# Altium PCB ee453_pcb_N-B-S.PcbDoc (part 2 of 2)
Units mil, origin at the board's own origin, x right, y up, seen from the top; angles counter-clockwise.
Board outline 6000 x 5000 mil, 4 copper layers (Power Layer, Signal layer, Ground layer, Extra signal layer), stack 53.912 mil thick; 97 components, 66 nets, 398 pads, 70 vias.
Unrouted connection lines stored in the file: 8.
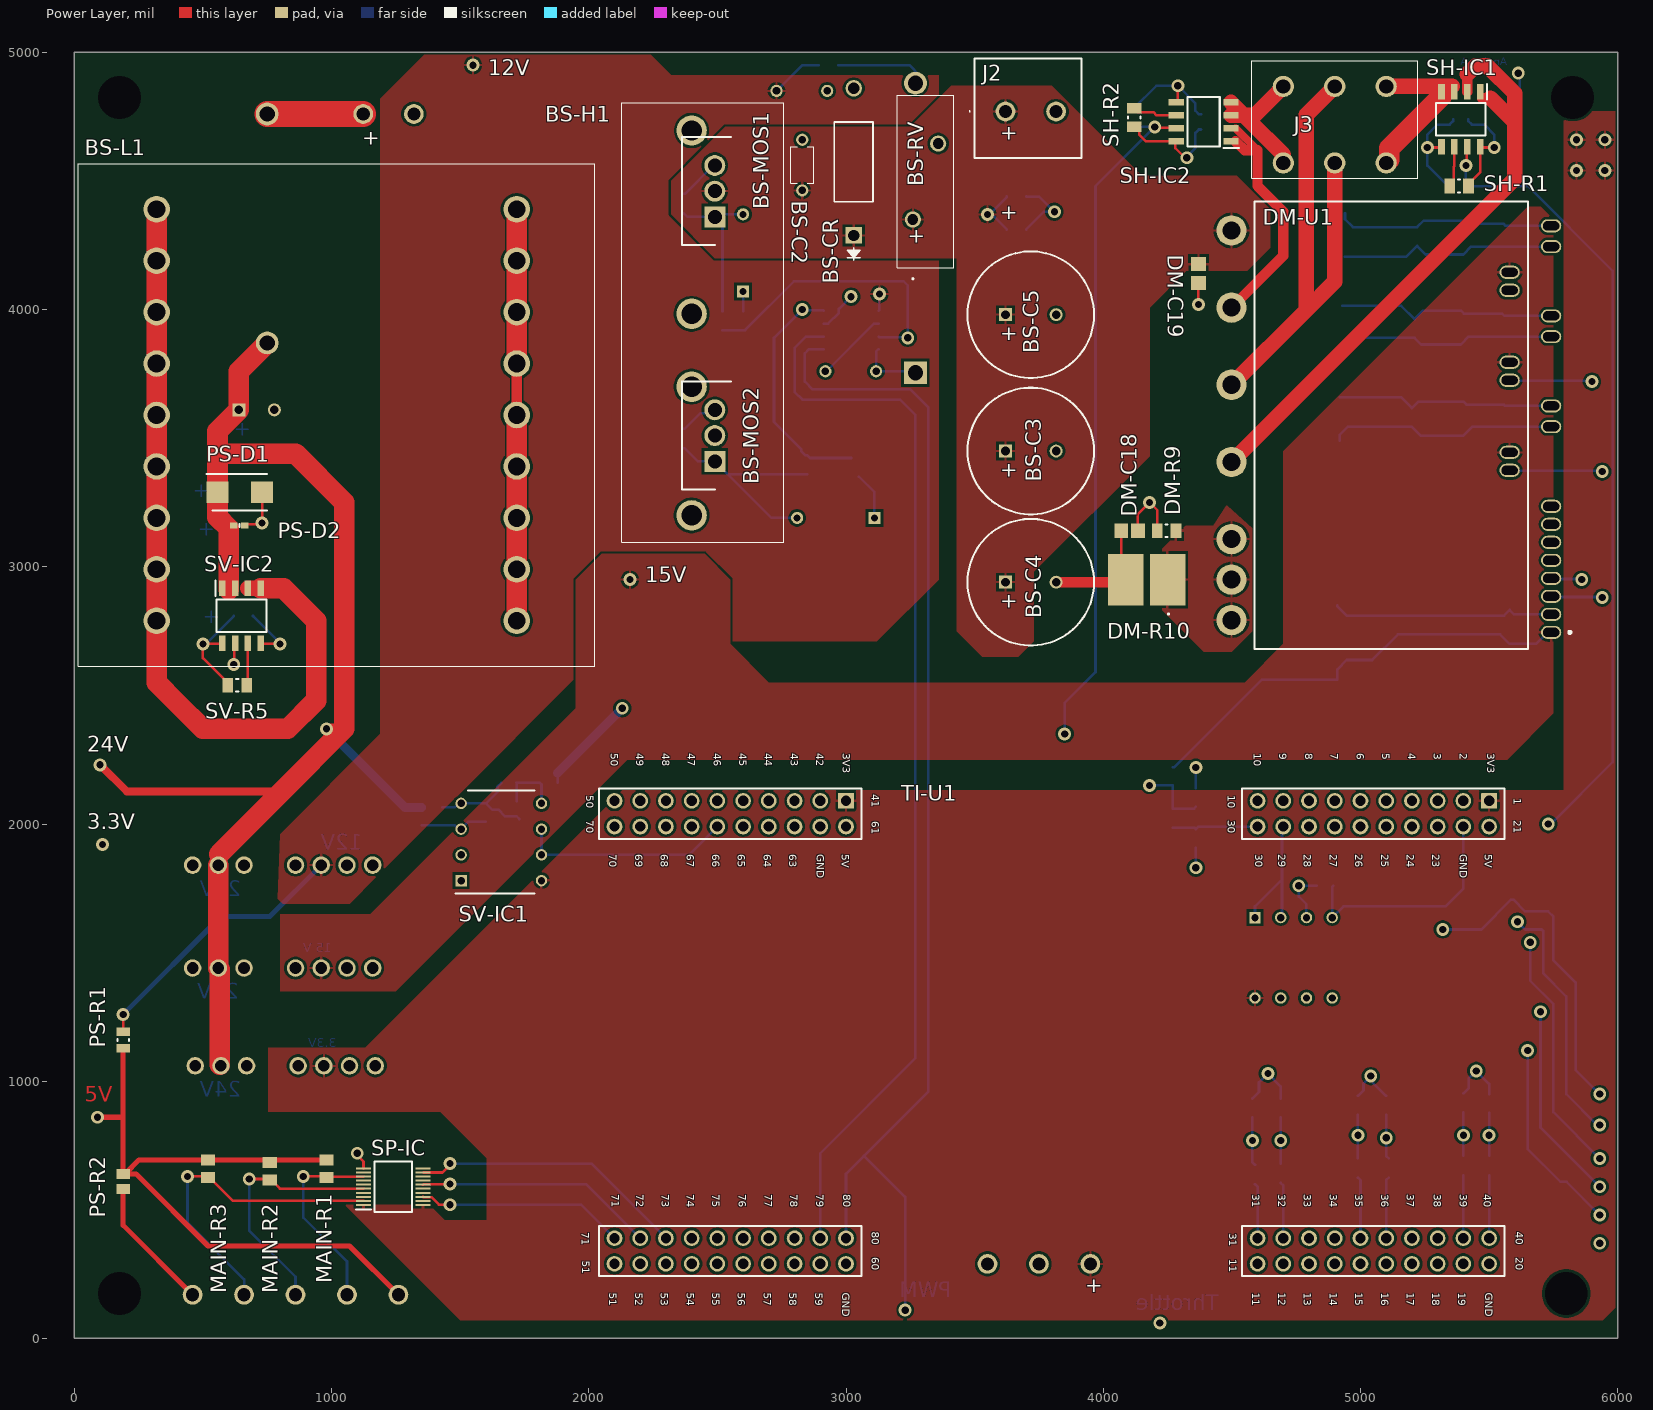
[diagram p0: Power Layer view]

## Via types
v1: diameter 50, hole 28, Power Layer to Extra signal layer, 69 vias
v2: diameter 50/50/50/50 (per signal layer), hole 28, Power Layer to Extra signal layer, 1 vias

## Nets (pads, with @x,y where several pads share a name; then routed paths per layer and width w, separated by ;. In a path a pad name is that pad's centre, name@x,y a point inside that pad or via, vN(x,y) a via of type N, cw(c..) or ccw(c..) an arc to the next point about the centre after c; other vN are vias at no path point) (continued)
GND: (continued)
  Extra signal layer w10: SV-C3.1 694.8,2808.03 800,2702.83 v1(800,2700) ; SV-R2.1 1478.82,2064.45 1494.37,2080 SV-IC1.4 SV-C1.1 ; SV-R4.1 1645.31,2145.31 1645.31,2124.33 1600.98,2080 SV-C1.1 ; SV-C2.2@1730.47,2019.53 SV-C2.2 1674.7,2030 1649.23,2055.47 1624.53,2055.47 SV-C1.1 ; BS-R8.1 2373.94,3536.77 2434.25,3597.09 2477.09,3597.09 BS-MOS2.3 ; BS-IC1.3 2930.45,3945 2972.59,3987.14 2972.59,4002.59 v1(3020,4050) ; BS-C8.1 3700,4311.97 3768.03,4380 v1(3810,4380) 3751.97,4438.03 3701.97,4438.03 BS-C7.1 ; SH-C4.1 4207.17,4870 v1(4290,4870) 4358.43,4801.57 4358.43,4772.76 4372.13,4759.06 SH-C2.2 ; v2(4360,1830) DM-C4.1 ; DM-C5.1 v1(4360,2220) ; DM-C3.1 4605.51,958.35 4605.51,995.51 v1(4640,1030) 4690,980 DM-C9.1 ; DM-C6.1 4890,1755.04 SH-IC3.4 4933.7,1680 5330,1680 5400,1750 TI-U1.22 ; DM-C11.2 4910,2846.34 4946.34,2810 DM-C10.1 5558.11,2810 DM-D4.1 5596.89,2815 DM-U1.2 ; DM-C2.1 5011.72,964.55 5011.72,991.72 v1(5040,1020) 5047.65,1012.35 5047.65,995.18 DM-C8.1 ; SH-C3.1 5260,4560 v1(5260,4630) 5260,4680 5298.43,4718.43 5346.3,4718.43 5360,4732.13 SH-C1.2 ; DM-C1.1 5421.72,974.55 5421.72,1011.72 v1(5450,1040) 5500,990 DM-C7.1
hallInA: J4.2 MAIN-R1.1 SP-IC.8 | length 768.2
  Power Layer w10: v1(890,630) 975.55,630 MAIN-R1.1 983.82,629.37 SP-IC.8
  Extra signal layer w10: v1(890,630) 890,470 1060,300 J4.2
hallInB: J4.3 MAIN-R2.1 SP-IC.5 | length 984.6
  Power Layer w10: v1(680,620) 755.55,620 MAIN-R2.1 765.91,615.55 799.33,582.13 SP-IC.5
  Extra signal layer w10: v1(680,620) 680,420 860,240 J4.3
hallInC: J4.4 MAIN-R3.1 SP-IC.2 | length 1274.9
  Power Layer w10: v1(440,630) 515.55,630 MAIN-R3.1 525.91,625.55 616.57,534.88 SP-IC.2
  Extra signal layer w10: v1(440,630) 440,450 660,230 J4.4
HO: BS-D2.2 BS-MOS1.1 BS-R3.2 BS-R7.1 | length 619.3
  Extra signal layer w10: BS-R7.1 2383.23,4360 BS-MOS1.1 ; BS-R3.2 2520,4330 BS-MOS1.1 ; BS-D2.2 2500.12,4370.12 BS-MOS1.1
Inductor: BS-Cboot.1 BS-IC1.6 BS-L1.10 BS-L1.11 BS-L1.12 BS-L1.13 BS-L1.14 BS-L1.15 BS-L1.16 BS-L1.17 BS-L1.18 BS-MOS1.3 BS-MOS2.2 BS-R7.2 | length 2049
  Power Layer w40: BS-L1.14 BS-L1.15
  Power Layer w80: BS-L1.10 BS-L1.11 BS-L1.12 BS-L1.13 BS-L1.14 ; BS-L1.15 BS-L1.16 BS-L1.17 BS-L1.18
  Extra signal layer w10: BS-R7.2 2373.94,4450 2483.94,4560 BS-MOS1.3 ; BS-Cboot.1 2924.55,3760 3109.55,3945 BS-IC1.6
LO: BS-D1.2 BS-MOS2.1 BS-R1.2 BS-R8.2 | length 861.8
  Extra signal layer w10: BS-R8.2 2373.94,3460 2423.94,3410 BS-MOS2.1 2540,3360 ; BS-D1.2 2710,3190 2540,3360 ; BS-R1.2 2540,3360
NetBS-D1_1: BS-D1.1 BS-R2.2 | length 185
  Extra signal layer w10: 3050,3350 3110.24,3289.76 BS-D1.1
NetBS-D2_1: BS-D2.1 BS-R4.2 | length 77
  Extra signal layer w10: BS-R4.2 BS-D2.1
NetBS-IC1_4: BS-IC1.4 BS-R1.1 BS-R2.1 | length 927.1
  Extra signal layer w10: v1(2830,4000) 2720,3890 2720,3562.83 2826.46,3456.38 2826.46,3448.5 2842.13,3432.83 BS-R1.1 2860,3422.83 BS-R2.1 ; v1@2832.5,3997.5 2910.73,3997.5 BS-IC1.4
NetBS-IC1_7: BS-IC1.7 BS-R3.1 BS-R4.1 | length 1124.7
  Extra signal layer w10: BS-R3.1 BS-R4.1 2607.87,3920 2797.87,4110 3224.14,4110 3240,4094.14 v1(3240,3890) 3237.5,3892.5 3129.27,3892.5 BS-IC1.7
NetDM-C12_1: DM-C12.1 DM-C13.2 DM-D3.1 DM-U1.19 | length 845
  Extra signal layer w10: DM-C13.2 5178.19,4205.35 DM-C12.1 5253.11,4214.06 DM-D3.1 5430.59,4244.65 DM-U1.19
NetDM-C14_1: DM-C14.1 DM-C15.2 DM-D2.1 DM-U1.15 | length 863.8
  Extra signal layer w10: DM-C15.2 4930,3863.5 4956.5,3890 DM-C14.1 5235.94,3864.06 DM-D2.1 5420.59,3894.65 DM-U1.15
NetDM-C16_1: DM-C16.1 DM-C17.2 DM-D1.1 DM-U1.11 | length 885.6
  Extra signal layer w10: DM-C17.2 4920,3513.62 4949.96,3543.58 DM-C16.1 5233.58,3510 DM-D1.1 5434.65,3544.65 DM-U1.11
NetJ0_1: J0.1 PS-FH1.1 | length 373.1
  Power Layer w100: PS-FH1.1 J0.1
NetSH-IC1_6: SH-IC1.6 SH-R1.2 | length 160.6
  Power Layer w10: SH-R1.2 5362.83,4495.67 5362.83,4554.79 5365,4556.96 SH-IC1.6
NetSH-IC2_6: SH-IC2.6 SH-R2.2 | length 174.8
  Power Layer w10: SH-R2.2 4135.67,4767.17 4194.79,4767.17 4206.96,4755 SH-IC2.6
NetSV-IC2_6: SV-IC2.6 SV-R5.1 | length 168.8
  Power Layer w10: SV-R5.1 675,2545 SV-IC2.6 SV-IC2.6@672.5,2700.73
"Pot A- To-TI": SP-IC.12 TI-U1.73 | length 1082.5
  Power Layer w10: SP-IC.12 1431.24,645.12 1460,673.88 v1(1460,680)
  Extra signal layer w10: v1(1460,680) 2010,680 TI-U1.73
"Pot B- To-TI": SP-IC.15 TI-U1.72 | length 932.2
  Power Layer w10: SP-IC.15 1356.73,598.94 1458.94,598.94 v1(1460,600)
  Extra signal layer w10: v1(1460,600) 1990,600 TI-U1.72
"Pot C- To-TI": SP-IC.18 TI-U1.71 | length 810.9
  Power Layer w10: SP-IC.18 1356.73,549.57 1388.1,549.57 1417.67,520 v1(1460,520)
  Extra signal layer w10: v1(1460,520) 1970,520 TI-U1.71
PWM-A-Bot: DM-R1.1 TI-U1.39 | length 245.2
  Extra signal layer w10: TI-U1.39 DM-R1.1
PWM-A-Top: DM-R6.1 TI-U1.40 | length 245.2
  Extra signal layer w10: TI-U1.40 DM-R6.1
PWM-B-Bot: DM-R2.1 TI-U1.35 | length 239.3
  Extra signal layer w10: DM-R2.1 5000,615.2 TI-U1.35
PWM-B-Top: DM-R7.1 TI-U1.36 | length 239.3
  Extra signal layer w10: TI-U1.36 5100,615.2 DM-R7.1
PWM-C-Bot: DM-R3.1 TI-U1.31 | length 214.1
  Extra signal layer w10: DM-R3.1 4600,590 TI-U1.31
PWM-C-Top: DM-R8.1 TI-U1.32 | length 219.3
  Extra signal layer w10: DM-R8.1 4700,595.2 TI-U1.32
PWM-To-Boost: BS-IC1.1 TI-U1.80 | length 4739.7
  Extra signal layer w10: BS-IC1.1 2855,3845 2840,3830 2840,3720 2870,3690 3250,3690 3320,3620 3320,960 3070,710 ; TI-U1.80 3000,640 3070,710 ; v1(3230,110) 3230,550 3070,710
RS: BS-Dboot.2 BS-Rboot.1 | length 336.6
  Extra signal layer w10: BS-Rboot.1 3246.15,4950 3286.15,4910 BS-Dboot.2@3290,4910
SD: BS-IC1.2 TI-U1.79 | length 4162.4
  Extra signal layer w10: TI-U1.79 2900,720 3270,1090 3270,3590 3210,3650 2830,3650 2800,3680 2800,3850 2845,3895 BS-IC1.2
Shunt: DM-R9.1 DM-R10.1 DM-U1.21 DM-U1.22 DM-U1.23
Shutdown: DM-C18.2 DM-R9.2 DM-U1.8 | length 1818.6
  Power Layer w10: DM-C18.2 4134.96,3204.96 v1(4180,3250) 4210,3220 DM-R9.2
  Signal layer w10: v1(4180,3250) 4187.5,3242.5 5733.76,3242.5 DM-U1.8
Throttle: J1.2 TI-U1.63 | length 2910.1
  Signal layer w10: 3690,350 3690,65.86 3695.86,60 v1(4220,60)
  Signal layer w20: TI-U1.63 2800,1240 3690,350 J1.2
VB: BS-Cboot.2 BS-Dboot.1 BS-IC1.8 | length 273.5
  Extra signal layer w10: BS-IC1.8 3124.65,3845 3116.85,3837.2 BS-Cboot.2 3265.98,3760 BS-Dboot.1@3290,3784.02
VFO-OUT: DM-C5.2 DM-R4.2 DM-R5.2 DM-U1.6 | length 2227.2
  Signal layer w10: v1(4180,2150) 4782.48,2150 5727.48,3095 DM-U1.6
  Extra signal layer w10: v1(4180,2150) 4268.9,2150 DM-R4.2 DM-R5.2 4352.83,2060 DM-C5.2
VFO-To-TI: DM-C4.2 DM-R5.1 TI-U1.30 | length 336.3
  Extra signal layer w10: DM-R5.1 4354.8,1985.2 DM-C4.2 4370,1990 TI-U1.30
VTO-To-Sensing: DM-C6.2 DM-U1.7 SH-IC3.3 | length 3429.5
  Signal layer w10: v1(4760,1760) 4110,1760 4050,1820 4050,2230 4140,2320 4882.48,2320 5727.48,3165 DM-U1.7
  Extra signal layer w10: SH-IC3.3 4790,1687.98 4760,1717.98 v1(4760,1760) DM-C6.2
VTO-To-TI: SH-IC3.1 SH-IC3.2 TI-U1.29 | length 550
  Extra signal layer w10: SH-IC3.1 4590,1680 4695,1785 ; SH-IC3.2 4695,1641.3 4695,1785 ; TI-U1.29 4695,1985 4695,1785
pads on no net: PS-PS1.3 PS-PS1.5 PS-PS1.8 PS-PS2.3 PS-PS2.5 PS-PS2.8 PS-PS3.3 PS-PS3.5 PS-PS3.8 SH-IC3.5 SH-IC3.6 SH-IC3.7 SP-IC.3 SP-IC.4 SP-IC.6 SP-IC.7 SP-IC.9 SP-IC.11 SP-IC.13 SP-IC.14 SP-IC.16 SP-IC.17 SP-IC.19 TI-U1.2 TI-U1.3 TI-U1.4 TI-U1.5 TI-U1.6 TI-U1.7 TI-U1.8 TI-U1.9 TI-U1.10 TI-U1.11 TI-U1.12 TI-U1.13 TI-U1.14 TI-U1.15 TI-U1.16 TI-U1.17 TI-U1.18 TI-U1.19 TI-U1.21 TI-U1.25 TI-U1.26 TI-U1.27 TI-U1.28 TI-U1.33 TI-U1.34 TI-U1.37 TI-U1.38 TI-U1.42 TI-U1.43 TI-U1.44 TI-U1.45 TI-U1.46 TI-U1.47 TI-U1.49 TI-U1.50 TI-U1.51 TI-U1.52 TI-U1.53 TI-U1.54 TI-U1.55 TI-U1.56 TI-U1.57 TI-U1.58 TI-U1.59 TI-U1.61 TI-U1.64 TI-U1.65 TI-U1.68 TI-U1.69 TI-U1.70 TI-U1.74 TI-U1.75 TI-U1.76 TI-U1.77 TI-U1.78

## Polygon pours and split planes (outlines as drawn)
GND on Ground layer "GND_L03_P024" (solid, pour order 24): 0,5000 0,0 6000,0 6000,5000
GND on Ground layer "GND_L03_P001" (solid, pour order 1): 910,4910 1440,4910 1440,4530 900,4530
GND on Ground layer "GND_L03_P000" (solid, pour order 0): 410,4890 390,4870 390,90 3120,90 3060,150 3060,2220 1060,2220 910,2370 910,4890
+12 on Power Layer "+12_L01_P021" (solid, pour order 21): 1360,4990 2240,4990 2320,4910 3360,4910 3360,2950 3120,2710 2090,2710 1070,1690 810,1690 790,1710 800,1960 1190,2350 1190,4820
+48 on Power Layer "+48_L01_P011" (solid, pour order 11): 3730,2710 3730,2980 4180,3430 4180,4006.48 4323.52,4150 4560,4150 4650,4240 4650,4390 4520,4520 4150,4520 3800,4870 3410,4870 3250,4710 2530,4710 2320,4500 2320,4370 2490,4200 3430,4200 3430,2750 3530,2650 3670,2650
+3.3 on Power Layer "+3.3_L01_P003" (solid, pour order 3): 1603.03,70.96 1602.07,70 1500,70 1050,520 1380,520 1440,460 1603.03,460 1603.03,700.96 1573.03,730.96 1423.03,880.96 753.03,880.96 753.03,1130.96 1130.96,1130.96 2130.96,2130.96 5790,2130.96 5790,4770.96 5990,4770.96 5990,120 5940.96,70.96
Shunt on Power Layer "SHUNT_L01_P025" (solid, pour order 25): 4480,3240 4580,3150 4580,2750 4500,2670 4390,2670 4230,2830 4230,3070 4320,3160 4428.24,3160
+15 on Power Layer "+15_L01_P008" (solid, pour order 8): 800,1350 1250,1350 2150,2250 5570,2250 5750,2430 5750,4350 5700,4400 5650,4400 4700,3450 4700,2700 4550,2550 2700,2550 2550,2700 2550,2950 2450,3050 2050,3050 1950,2950 1950,2450 1150,1650 800,1650
+3.3 on Signal layer "+3.3_L02_P015" (solid, pour order 15): 5950,4940 5920,4970 4090,4970 4010,4890 4010,4660 4280,4390 5930,4390 5990,4450 5990,4860
Inductor on Signal layer "INDUCTOR_L02_P022" (solid, pour order 22): 1458.78,2990 1460,2988.78 1460,2880 1680,2660 2100,2660 2100,2715.61 2374.39,2990 3290,2990 3380,3080 3380,4660 3090,4950 1710,4950 1440,4680

## Other copper
Power Layer:
  text "5V" at 40,920 h60
Extra signal layer:
  text "Analog A" at 5570,4950 h30
  text "+" at 620,3510 h60
  text "+" at 460,3270 h60
  text "+" at 480,3120 h60
  text "+" at 500,2780 h60
  text "12V" at 1120,1900 h60
  text "24V" at 650,1720 h60
  text "15 V" at 1000,1490 h60
  text "24V" at 640,1320 h60
  text "3.3V" at 1020,1120.67 h60
  text "24V" at 650,940 h60
  text "PWM" at 3410,160 h60
  text "Throttle" at 4450,110 h60

## Silkscreen, mask and mechanical layers (free items; w line width, h text height)
Top Overlay:
  text "12V" at 1610,4910 h60
  text "+" at 3600,4660 h60
  text "+" at 1120,4640 h60
  text "+" at 3600,4350 h60
  text "+" at 3240,4260 h60
  text "+" at 3600,3880 h60
  text "+" at 3600,3350 h60
  text "15V" at 2220,2940 h60
  text "+" at 3600,2840 h60
  text "24V" at 50,2280 h60
  text "3.3V" at 50,1980 h60
  text "+" at 3930,180 h60
Bottom Overlay:
  text "+" at 3030,4930 h60
  text "+" at 3910,4490 h60
  text "+" at 2870,4430 h60
  text "+" at 5210,4370 h60
  text "+" at 4760,4330 h60
  text "+" at 5320,4320 h60
  text "+" at 2940,4250 h60
  text "+" at 5190,4020 h60
  text "+" at 4780,4010 h60
  text "+" at 5430,4000 h60
  text "+" at 4760,3660 h60
  text "+" at 5430,3650 h60
  text "+" at 5110,3590 h60
  text "+" at 3090,3080 h60
  text "+" at 5180,2660 h60
  text "+" at 5560,2610 h60
  text "+" at 4800,2450 h60
  text "+" at 4220,2250 h60
  text "+" at 4730,1580 h60
  text "C B" at 5870,930 h60
  text "C T" at 5870,810 h60
  text "+" at 5020,790 h60
  text "+" at 5430,790 h60
  text "+" at 4610,770 h60
  text "B B" at 5870,690 h60
  text "B T" at 5860,560 h60
  text "A B" at 5850,460 h60
  text "A T" at 5850,340 h60

## Text inside footprints (layer, text, board x,y; h text height)
BS-CR: Mechanical 13 "0.14in/3.556mm" at 3042.5,4980 h25 r90; Mechanical 13 "0.572in/14.529mm" at 3195,4474 h25 r90; Mechanical 13 "0.3in/7.62mm" at 2890,4499 h25 r90
TI-U1: Top Overlay "78" at 2783.66,560.15 h30 r270; Top Overlay "79" at 2883.66,560.15 h30 r270; Top Overlay "39" at 5385,560.15 h30 r270; Top Overlay "38" at 5285,560.15 h30 r270; Top Overlay "27" at 4880,1881.57 h30 r270; Top Overlay "19" at 5380,176.85 h30 r270; Top Overlay "59" at 2880,176.85 h30 r270; Top Overlay "11" at 4580,176.85 h30 r270; Top Overlay "12" at 4680,176.85 h30 r270; Top Overlay "13" at 4780,176.85 h30 r270; Top Overlay "15" at 4980,176.85 h30 r270; Top Overlay "16" at 5080,176.85 h30 r270; Top Overlay "17" at 5180,176.85 h30 r270; Top Overlay "18" at 5280,176.85 h30 r270; Top Overlay "31" at 4580,560.15 h30 r270; Top Overlay "32" at 4680,560.15 h30 r270; Top Overlay "33" at 4780,560.15 h30 r270; Top Overlay "34" at 4880,560.15 h30 r270; Top Overlay "35" at 4980,560.15 h30 r270; Top Overlay "36" at 5080,560.15 h30 r270; Top Overlay "37" at 5180,560.15 h30 r270; Top Overlay "14" at 4880,176.85 h30 r270; Top Overlay "51" at 2080,176.85 h30 r270; Top Overlay "52" at 2180,176.85 h30 r270; Top Overlay "53" at 2280,176.85 h30 r270; Top Overlay "55" at 2480,176.85 h30 r270; Top Overlay "56" at 2580,176.85 h30 r270; Top Overlay "57" at 2680,176.85 h30 r270; Top Overlay "58" at 2780,176.85 h30 r270; Top Overlay "80" at 2988.66,560.15 h30 r270; Top Overlay "72" at 2183.66,560.15 h30 r270; Top Overlay "73" at 2283.66,560.15 h30 r270; Top Overlay "74" at 2380,560.15 h30 r270; Top Overlay "75" at 2480,560.15 h30 r270; Top Overlay "76" at 2583.66,560.15 h30 r270; Top Overlay "77" at 2683.66,560.15 h30 r270; Top Overlay "54" at 2380,176.85 h30 r270; Top Overlay "67" at 2380,1881.57 h30 r270; Top Overlay "42" at 2885,2274.95 h30 r270; Top Overlay "43" at 2785,2274.95 h30 r270; Top Overlay "44" at 2685,2274.95 h30 r270; Top Overlay "45" at 2585,2274.95 h30 r270; Top Overlay "46" at 2485,2274.95 h30 r270; Top Overlay "47" at 2385,2274.95 h30 r270; Top Overlay "48" at 2285,2274.95 h30 r270; Top Overlay "49" at 2185,2274.95 h30 r270; Top Overlay "50" at 2085,2274.95 h30 r270; Top Overlay "63" at 2780,1881.57 h30 r270; Top Overlay "64" at 2680,1881.57 h30 r270; Top Overlay "65" at 2580,1881.57 h30 r270; Top Overlay "66" at 2480,1881.57 h30 r270; Top Overlay "68" at 2280,1881.57 h30 r270; Top Overlay "69" at 2180,1881.57 h30 r270; Top Overlay "70" at 2080,1881.57 h30 r270; Top Overlay "30" at 4590,1881.57 h30 r270; Top Overlay "29" at 4680,1881.57 h30 r270; Top Overlay "28" at 4780,1881.57 h30 r270; Top Overlay "26" at 4980,1881.57 h30 r270; Top Overlay "25" at 5080,1881.57 h30 r270; Top Overlay "24" at 5180,1881.57 h30 r270; Top Overlay "23" at 5280,1881.57 h30 r270; Top Overlay "10" at 4585,2274.95 h30 r270; Top Overlay "9" at 4685,2274.95 h30 r270; Top Overlay "8" at 4785,2274.95 h30 r270; Top Overlay "7" at 4885,2274.95 h30 r270; Top Overlay "6" at 4985,2274.95 h30 r270; Top Overlay "5" at 5085,2274.95 h30 r270; Top Overlay "4" at 5185,2274.95 h30 r270; Top Overlay "3" at 5285,2274.95 h30 r270; Top Overlay "2" at 5385,2274.95 h30 r270; Top Overlay "41" at 3100,2115 h30 r270; Top Overlay "61" at 3100,2010 h30 r270; Top Overlay "50" at 1990,2112 h30 r270; Top Overlay "70" at 1990,2015 h30 r270; Top Overlay "60" at 3100,315 h30 r270; Top Overlay "80" at 3100,415 h30 r270; Top Overlay "71" at 2090,560.15 h30 r270; Top Overlay "10" at 4485,2112 h30 r270; Top Overlay "1" at 5595,2100 h30 r270; Top Overlay "30" at 4485,2015 h30 r270; Top Overlay "21" at 5595,2015 h30 r270; Top Overlay "20" at 5603.05,315 h30 r270; Top Overlay "11" at 4490,307 h30 r270; Top Overlay "31" at 4490,410 h30 r270; Top Overlay "40" at 5603.05,415 h30 r270; Top Overlay "GND" at 5485,176.85 h30 r270; Top Overlay "GND" at 5386.45,1881.57 h30 r270; Top Overlay "5V" at 5483.05,1881.57 h30 r270; Top Overlay "3V3" at 5493.05,2274.95 h30 r270; Top Overlay "5V" at 2983.05,1881.57 h30 r270; Top Overlay "GND" at 2886.45,1881.57 h30 r270; Top Overlay "3V3" at 2988.05,2274.95 h30 r270; Top Overlay "GND" at 2985,176.85 h30 r270; Top Overlay "40" at 5480,560.15 h30 r270; Top Overlay "71" at 1973.46,412.38 h30 r270; Top Overlay "51" at 1975,301.85 h30 r270; Bottom Overlay "AB2/G1I" at 4890,1728.46 h25 r270; Bottom Overlay "AC0/G3I" at 4785,1724.29 h25 r270; Bottom Overlay "AA9/G5I" at 4690,1724.29 h25 r270; Bottom Overlay "AA1/DACB" at 4530,1700 h30 r270; Bottom Overlay "AA8/G6O" at 2285,2169.33 h25 r270; Bottom Overlay "AA4/G2O" at 2485,2169.33 h25 r270; Bottom Overlay "AB4/G4O" at 2590,2169.33 h25 r270; Bottom Overlay "AC4" at 4785,2194.97 h30 r270; Bottom Overlay "AB3" at 4985,2194.97 h30 r270; Bottom Overlay "NC" at 5085,2224.96 h30 r270; Bottom Overlay "AA5" at 5280,1801.6 h30 r270; Bottom Overlay "AB0" at 5180,1801.6 h30 r270; Bottom Overlay "AC2" at 5080,1801.6 h30 r270; Bottom Overlay "AB1" at 4980,1811.6 h30 r270; Bottom Overlay "PGAGND" at 5380,2165 h30 r270; Bottom Overlay "P13" at 5285,2199.97 h30 r270; Bottom Overlay "P40" at 5185,2194.97 h30 r270; Bottom Overlay "P56" at 4885,2194.97 h30 r270; Bottom Overlay "P37" at 4685,2194.97 h30 r270; Bottom Overlay "P35" at 4585,2194.97 h30 r270; Bottom Overlay "NC" at 2085,2224.96 h30 r270; Bottom Overlay "NC" at 2185,2224.96 h30 r270; Bottom Overlay "P22" at 2385,2194.97 h30 r270; Bottom Overlay "P29" at 2685,2194.97 h30 r270; Bottom Overlay "P28" at 2785,2194.97 h30 r270; Bottom Overlay "PGAGND" at 2880,2165 h30 r270; Bottom Overlay "AA0/DACA" at 2030,1651.65 h30 r270; Bottom Overlay "AC1" at 2480,1811.6 h30 r270; Bottom Overlay "AA6" at 2780,1801.6 h30 r270; Bottom Overlay "P27" at 2880,96.88 h30 r270; Bottom Overlay "NC" at 2780,126.87 h30 r270; Bottom Overlay "NC" at 2680,126.87 h30 r270; Bottom Overlay "XRSn" at 2580,96.88 h30 r270; Bottom Overlay "P24" at 2480,96.88 h30 r270; Bottom Overlay "P31" at 2380,96.88 h30 r270; Bottom Overlay "P33" at 2280,96.88 h30 r270; Bottom Overlay "P34" at 2180,96.88 h30 r270; Bottom Overlay "P12" at 2080,96.88 h30 r270; Bottom Overlay "P00" at 2988.66,480.17 h30 r270; Bottom Overlay "P01" at 2883.66,490.17 h30 r270; Bottom Overlay "P06" at 2783.66,480.17 h30 r270; Bottom Overlay "P07" at 2678.66,480.17 h30 r270; Bottom Overlay "P02" at 2583.66,480.17 h30 r270; Bottom Overlay "P03" at 2483.66,480.17 h30 r270; Bottom Overlay "P26" at 2383.66,480.17 h30 r270; Bottom Overlay "P15" at 2283.66,485.17 h30 r270; Bottom Overlay "P14" at 2183.66,485.17 h30 r270; Bottom Overlay "P25" at 4580,480.17 h30 r270; Bottom Overlay "P18" at 4680,485.17 h30 r270; Bottom Overlay "P30" at 4780,480.17 h30 r270; Bottom Overlay "P58" at 4880,480.17 h30 r270; Bottom Overlay "P05" at 4980,480.17 h30 r270; Bottom Overlay "P04" at 5080,480.17 h30 r270; Bottom Overlay "P09" at 5180,480.17 h30 r270; Bottom Overlay "P08" at 5285,480.17 h30 r270; Bottom Overlay "P11" at 5385,495.17 h30 r270; Bottom Overlay "P10" at 5480,485.17 h30 r270; Bottom Overlay "P59" at 4580,96.88 h30 r270; Bottom Overlay "P23" at 4680,96.88 h30 r270; Bottom Overlay "P39" at 4780,96.88 h30 r270; Bottom Overlay "P17" at 4880,96.88 h30 r270; Bottom Overlay "P16" at 4980,96.88 h30 r270; Bottom Overlay "XRSn" at 5080,96.88 h30 r270; Bottom Overlay "NC" at 5180,126.87 h30 r270; Bottom Overlay "NC" at 5285,126.87 h30 r270; Bottom Overlay "P57" at 5380,96.88 h30 r270; Bottom Overlay "60" at 3100,260 h30 r270; Bottom Overlay "80" at 3100,370 h30 r270; Bottom Overlay "71" at 2090,520.16 h30 r270; Bottom Overlay "41" at 3100,2060 h30 r270; Bottom Overlay "61" at 3100,1970 h30 r270; Bottom Overlay "50" at 1990,2070 h30 r270; Bottom Overlay "70" at 1990,1970 h30 r270; Bottom Overlay "31" at 4490,370 h30 r270; Bottom Overlay "11" at 4490,270 h30 r270; Bottom Overlay "40" at 5603.05,360 h30 r270; Bottom Overlay "20" at 5603.05,265 h30 r270; Bottom Overlay "30" at 4485,1960 h30 r270; Bottom Overlay "10" at 4485,2070 h30 r270; Bottom Overlay "21" at 5595,1975 h30 r270; Bottom Overlay "1" at 5595,2085 h30 r270; Bottom Overlay "GND" at 2885,1801.6 h30 r270; Bottom Overlay "5V" at 2983.05,1831.59 h30 r270; Bottom Overlay "3V3" at 2990,2194.97 h30 r270; Bottom Overlay "GND" at 5385,1801.6 h30 r270; Bottom Overlay "5V" at 5483.05,1831.59 h30 r270; Bottom Overlay "3V3" at 5490,2194.97 h30 r270; Bottom Overlay "GND" at 5488.05,96.88 h30 r270; Bottom Overlay "GND" at 2983.05,96.88 h30 r270; Bottom Overlay "71" at 1973.46,372.39 h30 r270; Bottom Overlay "P12" at 1975,221.88 h30 r270